# Altium PCB LCD.PcbDoc
Units mm, origin at the board's own origin, x right, y up, seen from the top; angles counter-clockwise.
Board outline 58.42 x 69.6 mm, 2 copper layers (F.Cu, B.Cu); 2 components, 33 nets, 66 pads, 0 vias.
Unrouted connection lines stored in the file: 24.
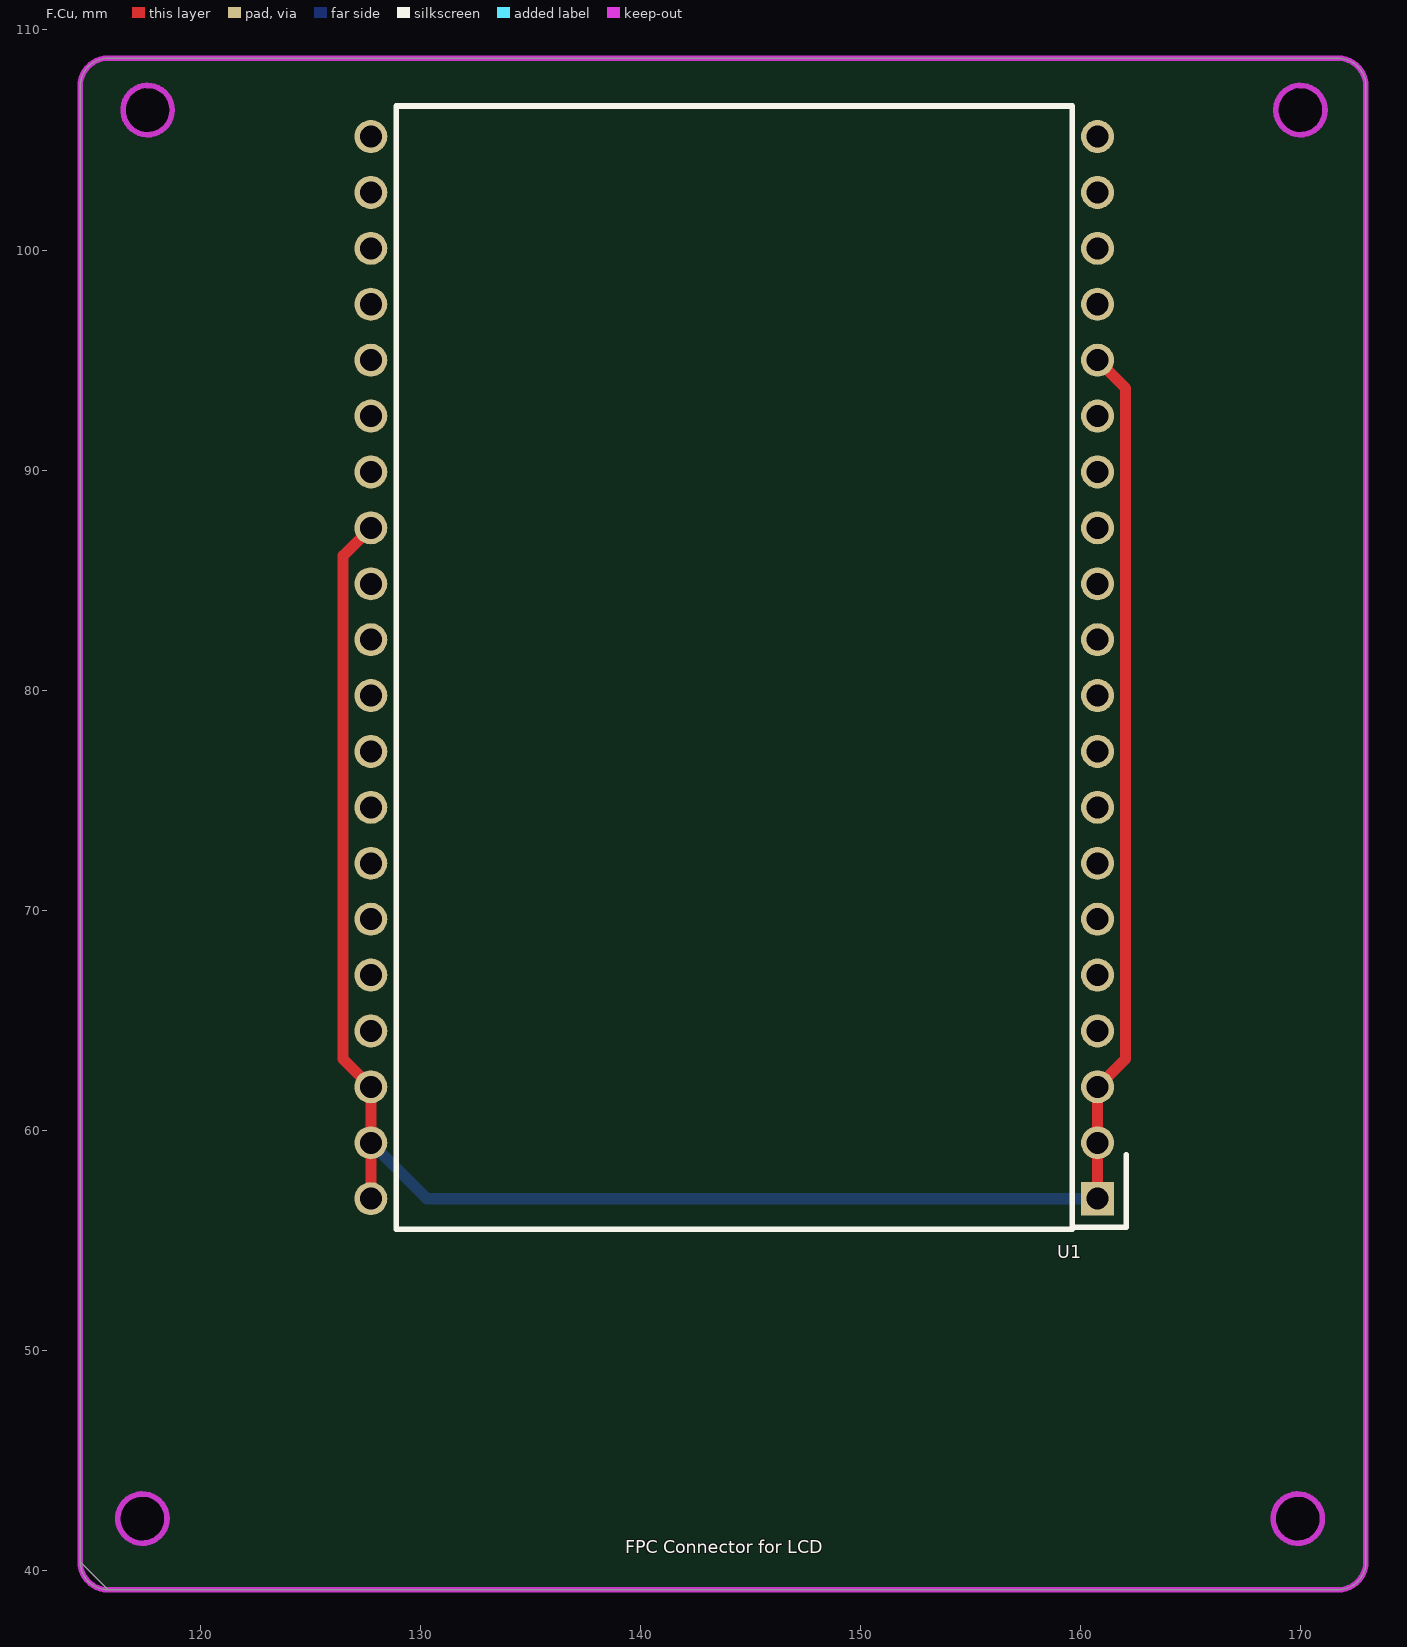
[diagram p0: F.Cu view]
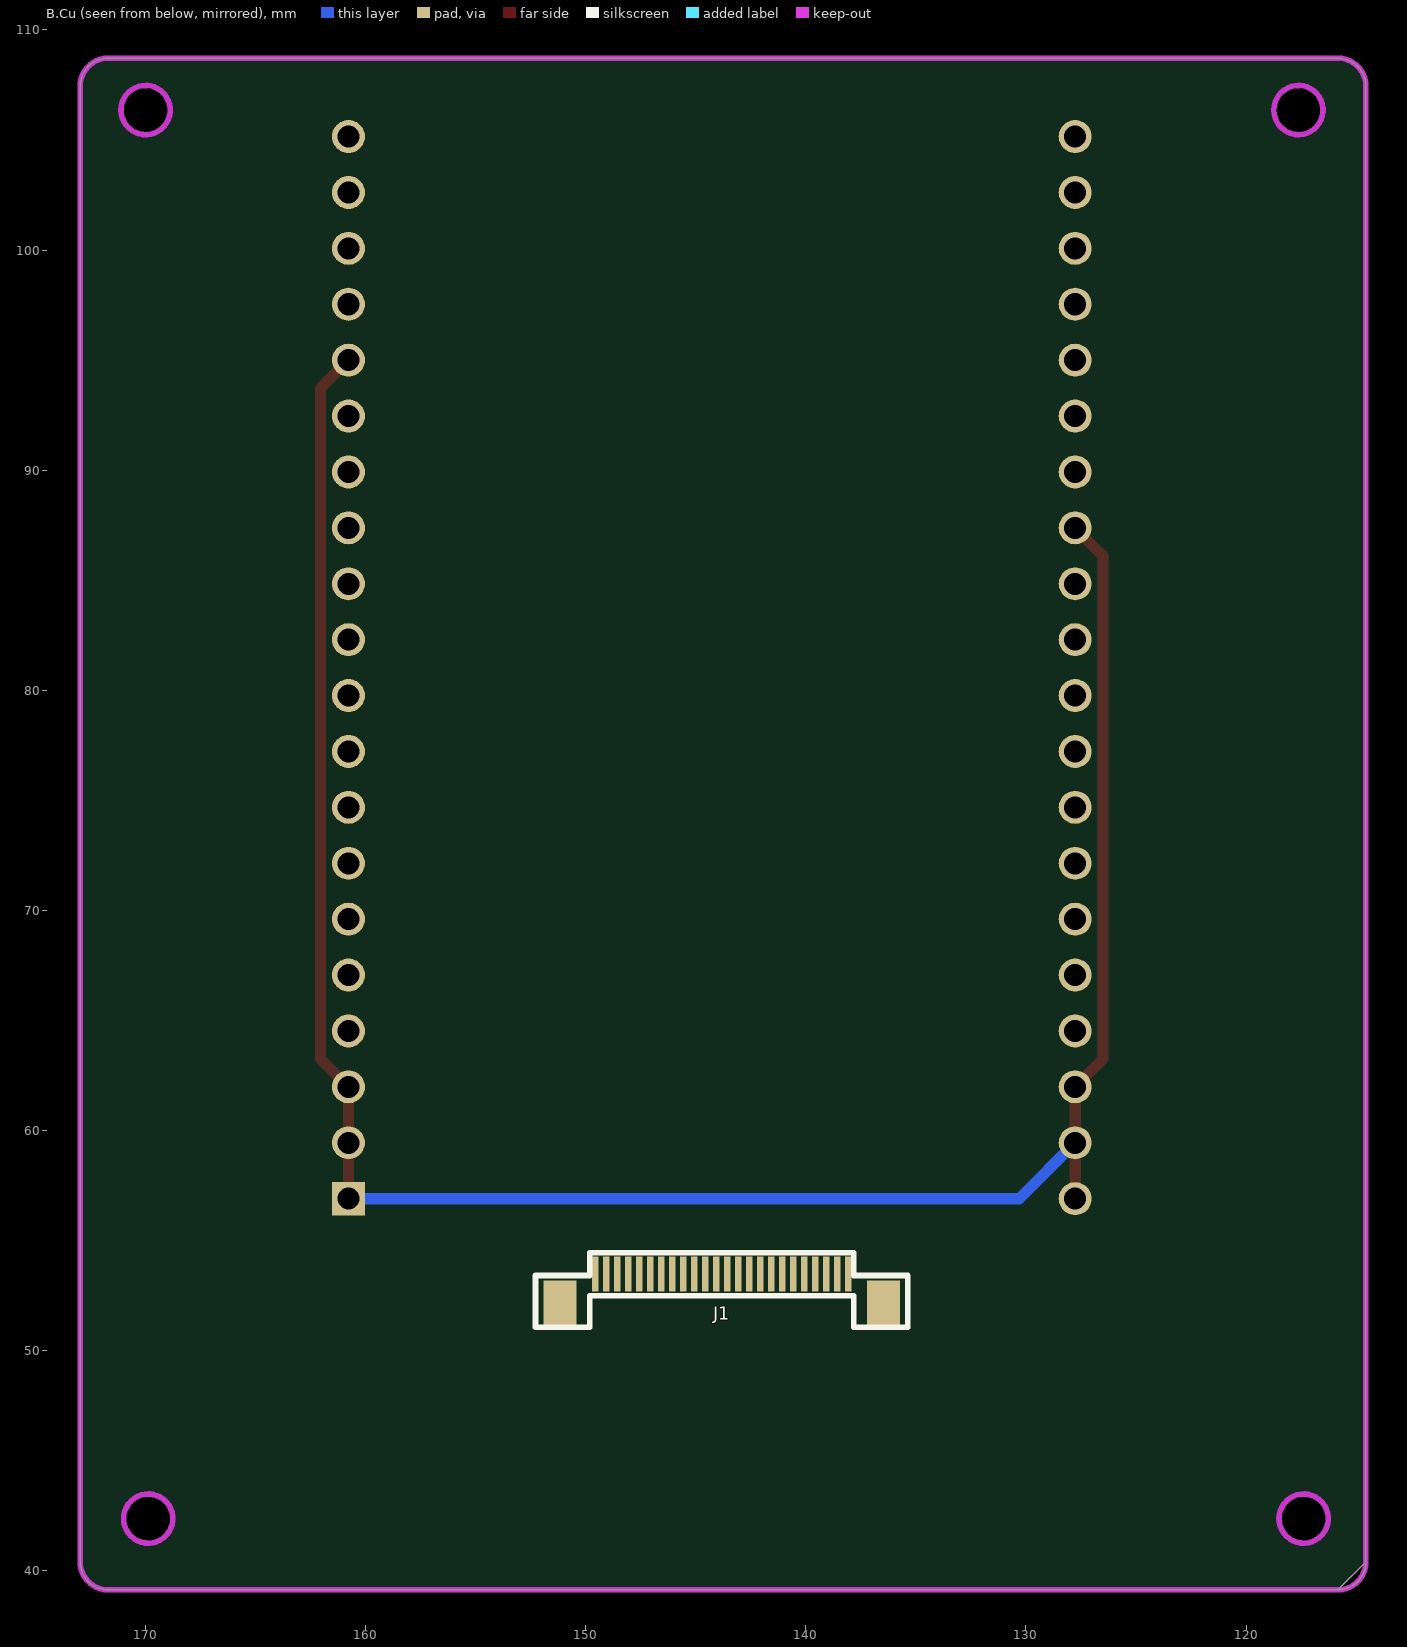
[diagram p1: B.Cu view, seen from below]

## Layer stack, top to bottom
F.Mask: solder mask 0.0102, Solder Resist, Dk 3.5
F.Cu: signal copper 0.0356
Dielectric 1: dielectric 0.32, FR-4, Dk 4.8
B.Cu: signal copper 0.0356
B.Mask: solder mask 0.0102, Solder Resist, Dk 3.5

## Board outline
115.824,39.122 cw(c115.824,40.392) 114.554,40.392 114.554,107.448 cw(c115.824,107.448) 171.704,108.718 cw(c171.704,107.448) 172.974,107.448 172.974,40.392 cw(c171.704,40.392) 171.704,39.122 115.824,39.122 cw(c115.824,40.392) 115.824,39.122
cut-out: 118.51,42.36 118.471,42.652 118.359,42.924 118.179,43.157 117.946,43.337 117.674,43.449 117.382,43.488 117.09,43.449 116.818,43.337 116.585,43.157 116.405,42.924 116.293,42.652 116.254,42.36 116.293,42.068 116.405,41.796 116.585,41.563 116.818,41.383 117.09,41.271 117.382,41.232 117.674,41.271 117.946,41.383 118.179,41.563 118.359,41.796 118.471,42.068 118.51,42.36
cut-out: 171.128,106.36 171.089,106.652 170.977,106.924 170.797,107.157 170.564,107.337 170.292,107.449 170,107.488 169.708,107.449 169.436,107.337 169.203,107.157 169.023,106.924 168.911,106.652 168.872,106.36 168.911,106.068 169.023,105.796 169.203,105.563 169.436,105.383 169.708,105.271 170,105.232 170.292,105.271 170.564,105.383 170.797,105.563 170.977,105.796 171.089,106.068 171.128,106.36
cut-out: 118.746,106.36 118.707,106.652 118.595,106.924 118.415,107.157 118.182,107.337 117.91,107.449 117.618,107.488 117.326,107.449 117.054,107.337 116.821,107.157 116.641,106.924 116.529,106.652 116.49,106.36 116.529,106.068 116.641,105.796 116.821,105.563 117.054,105.383 117.326,105.271 117.618,105.232 117.91,105.271 118.182,105.383 118.415,105.563 118.595,105.796 118.707,106.068 118.746,106.36
cut-out: 171.01,42.36 170.971,42.652 170.859,42.924 170.679,43.157 170.446,43.337 170.174,43.449 169.882,43.488 169.59,43.449 169.318,43.337 169.085,43.157 168.905,42.924 168.793,42.652 168.754,42.36 168.793,42.068 168.905,41.796 169.085,41.563 169.318,41.383 169.59,41.271 169.882,41.232 170.174,41.271 170.446,41.383 170.679,41.563 170.859,41.796 170.971,42.068 171.01,42.36

## Design rules (kind name [scope] priority, off if disabled: settings)
Clearance [All] p1: gap=0.254 ignorepadtopadclearanceinfootprint=FALSE except(0.125: Arc-SMDPad Track-SMDPad SMDPad-SMDPad)
Clearance "Clearence 0.508_Polygon" [InNamedPolygon('B.Cu-GND')] p2: gap=0.508 ignorepadtopadclearanceinfootprint=FALSE
MinimumSolderMaskSliver [All] p1: minsoldermaskwidth=0
PolygonConnect Polygon_B.Cu-GND_ConnectDirect [IsNamedPolygon('B.Cu-GND') vs IsVia] p1: connectstyle=Direct reliefconductorwidth=0.254 reliefentries=4 polygonreliefangle="90 Angle" airgapwidth=0.254
PolygonConnect Polygon_B.Cu-GND_ConnectRelief45 [IsNamedPolygon('B.Cu-GND') vs (IsThruPin or IsSMTPin) and (PadShape_AllLayers = 'Round')] p2: connectstyle=Relief reliefconductorwidth=0.508 reliefentries=4 polygonreliefangle="45 Angle" airgapwidth=0.508
PolygonConnect Polygon_B.Cu-GND_ConnectRelief90 [IsNamedPolygon('B.Cu-GND') vs (IsThruPin or IsSMTPin) and (PadShape_AllLayers <> 'Round')] p3: connectstyle=Relief reliefconductorwidth=0.508 reliefentries=4 polygonreliefangle="90 Angle" airgapwidth=0.508
RoutingVias [All] p1: holewidth=0.711 width=1.27 viastyle="Through Hole" minholewidth=0.711 minwidth=1.27 maxholewidth=0.711 maxwidth=1.27
SilkToSilkClearance [All] p1: silktosilkclearance=0
SilkToSolderMaskClearance [IsPad] p1: minsilkscreentomaskgap=0 clearancetoexposedcopper=TRUE
SolderMaskExpansion [All] p1: expansion=0.102 istentingtop=FALSE
Width Power_20mil [All] p1: maxlimit=25.4 minlimit=0.508 preferedwidth=0.508 minimp=50.000000 maximp=50.000000 favimp=50.000000
Width Power_12mil [All] p2: maxlimit=25.4 minlimit=0.305 preferedwidth=0.305 minimp=50.000000 maximp=50.000000 favimp=50.000000
Width Width_10mil [All] p3: maxlimit=25.4 minlimit=0.254 preferedwidth=0.254 minimp=50.000000 maximp=50.000000 favimp=50.000000
Width Width_8mil [All] p4: maxlimit=25.4 minlimit=0.203 preferedwidth=0.203 minimp=50.000000 maximp=50.000000 favimp=50.000000
27 further rules are at their usual default settings.

## Components (designator, comment, footprint, x,y, rotation, side; value= is the part's Value field where it differs from the comment)
J1 "FPC Connector" FPC_24 143.824,53.467 r0 bottom
U1 "DE113-XX-XX" DE113-XX-XX 160.782,56.896 r180 top

## Footprints (in the part's own frame and the unit in brackets; to place one, negate y for a bottom-side part, rotate by r counter-clockwise, add the part's x,y. Pads: shape width x height; smd on the part's side, far side on the other; paste and mask are expansions set on the pad)
DE113-XX-XX [mm]
  rect 1.5x1.524 hole 1 paste-2539.97 mask+0: 1(0,0)
  round 1.5 hole 1 paste-2539.97 mask+0: 2(0,-2.54) 3(0,-5.08) 4(0,-7.62) 5(0,-10.16) 6(0,-12.7) 7(0,-15.24) 8(0,-17.78) 9(0,-20.32) 10(0,-22.86) 11(0,-25.4) 12(0,-27.94) 13(0,-30.48) 14(0,-33.02) 15(0,-35.56) 16(0,-38.1) 17(0,-40.64) 18(0,-43.18) 19(0,-45.72) 20(0,-48.26) 21(33.02,-48.26) 22(33.02,-45.72) 23(33.02,-43.18) 24(33.02,-40.64) 25(33.02,-38.1) 26(33.02,-35.56) 27(33.02,-33.02) 28(33.02,-30.48) 29(33.02,-27.94) 30(33.02,-25.4) 31(33.02,-22.86) 32(33.02,-20.32) 33(33.02,-17.78) 34(33.02,-15.24) 35(33.02,-12.7) 36(33.02,-10.16) 37(33.02,-7.62) 38(33.02,-5.08) 39(33.02,-2.54) 40(33.02,0)
  silkscreen extent -1.3,-49.65 31.87,1.39
FPC_24 [mm]
  rect 1.5x2 smd mask+0: 0(-7.35,1.3) 0(7.35,1.3)
  rect 0.3x1.6 smd mask+0: 1(5.75,0) 2(5.25,0) 3(4.75,0) 4(4.25,0) 5(3.75,0) 6(3.25,0) 7(2.75,0) 8(2.25,0) 9(1.75,0) 10(1.25,0) 11(0.75,0) 12(0.25,0) 13(-0.25,0) 14(-0.75,0) 15(-1.25,0) 16(-1.75,0) 17(-2.25,0) 18(-2.75,0) 19(-3.25,0) 20(-3.75,0) 21(-4.25,0) 22(-4.75,0) 23(-5.25,0) 24(-5.75,0)
  silkscreen extent -8.46,-0.98 8.46,2.42

## Part data
J1: library part FPC_24, Sheetfile=LCD.kicad_sch
U1: "http://www.display-elektronik.de/filter/DE113-RS-20_635.pdf", Sheetfile=LCD.kicad_sch

## Nets (pads, with @x,y where several pads share a name; then routed paths per layer and width w, separated by ;. In a path a pad name is that pad's centre, name@x,y a point inside that pad or via, vN(x,y) a via of type N, cw(c..) or ccw(c..) an arc to the next point about the centre after c; other vN are vias at no path point)
20V_RANGE: J1.23 U1.12
200V_RANGE: J1.22 U1.8
GND: J1.24 U1.1 U1.2 U1.3 U1.16 U1.28 U1.38 U1.39 U1.40 | length 104.8
  F.Cu w0.508: U1.40 U1.39 U1.38 126.492,63.246 126.492,86.106 U1.28 ; U1.1 U1.2 U1.3 162.052,63.246 162.052,93.726 U1.16
  B.Cu w0.508: U1.39 130.302,56.896 U1.1
ICL7107_A1: J1.14 U1.30
ICL7107_A2: J1.7 U1.25
ICL7107_A3: J1.20 U1.21
ICL7107_B1: J1.15 U1.29
ICL7107_B2: J1.8 U1.24
ICL7107_B3: J1.3 U1.20
ICL7107_C1: J1.16 U1.11
ICL7107_C2: J1.9 U1.15
ICL7107_C3: J1.19 U1.19
ICL7107_D1: J1.17 U1.10
ICL7107_D2: J1.10 U1.14
ICL7107_D3: J1.4 U1.18
ICL7107_E1: J1.11 U1.9
ICL7107_E2: J1.5 U1.13
ICL7107_E3: J1.1 U1.17
ICL7107_F1: J1.13 U1.31
ICL7107_F2: J1.6 U1.26
ICL7107_F3: J1.2 U1.22
ICL7107_G1: J1.12 U1.32
ICL7107_G2: J1.18 U1.27
ICL7107_G3: J1.21 U1.23
unconnected-(U1-Pad4): U1.4
unconnected-(U1-Pad5): U1.5
unconnected-(U1-Pad6): U1.6
unconnected-(U1-Pad7): U1.7
unconnected-(U1-Pad33): U1.33
unconnected-(U1-Pad34): U1.34
unconnected-(U1-Pad35): U1.35
unconnected-(U1-Pad36): U1.36
unconnected-(U1-Pad37): U1.37
pads on no net: J1.0

## Polygon pours and split planes (outlines as drawn)
GND on B.Cu "B.Cu-GND" (solid, remove dead copper, pour order 0): 109.984,38.213 52.444,38.193 52.399,107.198 109.964,107.213

## Keep-outs
Edge.Cuts:
  circle w0.254: c170,106.36 r1.118
  circle w0.254: c117.618,106.36 r1.118
  circle w0.254: c169.882,42.36 r1.118
  circle w0.254: c117.382,42.36 r1.118
  circle w0: c117.382,42.36 r1.118
  lines w0: 114.554,40.392 ccw(c115.824,40.392) 115.824,39.122 ; 114.554,40.392 ccw(c115.824,40.392) 115.824,39.122 ; 114.554,40.392 115.824,39.122 ; 114.554,40.392 114.554,107.448 cw(c115.824,107.448) 115.824,108.718 171.704,108.718 cw(c171.704,107.448) 172.974,107.448 172.974,40.392 cw(c171.704,40.392) 171.704,39.122 115.824,39.122
  lines w0.254: 114.554,40.392 ccw(c115.824,40.392) 115.824,39.122 ; 114.554,40.392 ccw(c115.824,40.392) 115.824,39.122 ; 114.554,40.392 114.554,107.448 cw(c115.824,107.448) 115.824,108.718 171.704,108.718 cw(c171.704,107.448) 172.974,107.448 172.974,40.392 cw(c171.704,40.392) 171.704,39.122 115.824,39.122

## Silkscreen, mask and mechanical layers (free items; w line width, h text height)
F.SilkS:
  text "FPC Connector for LCD" at 139.314,40.569 h1